# Altium PCB SW6124Demo board.PcbDoc (part 1 of 3)
Units mm, origin at the board's own origin, x right, y up, seen from the top; angles counter-clockwise.
Board outline 64 x 25.82 mm, 4 copper layers (Top Layer, Signal, power, Bottom Layer); 54 components, 46 nets, 211 pads, 291 vias.
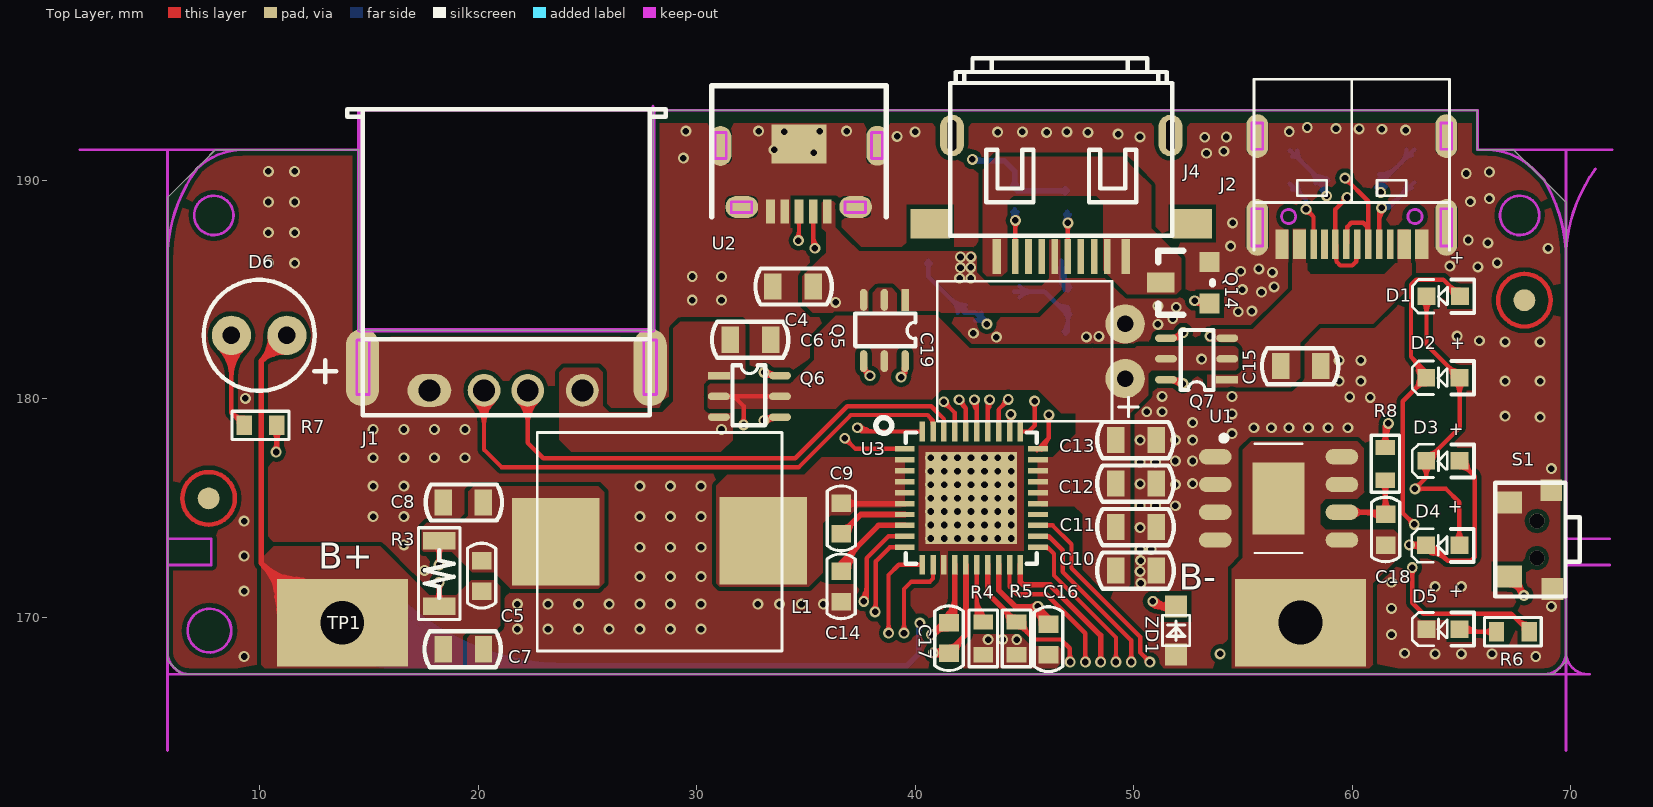
[diagram p0: Top Layer view]
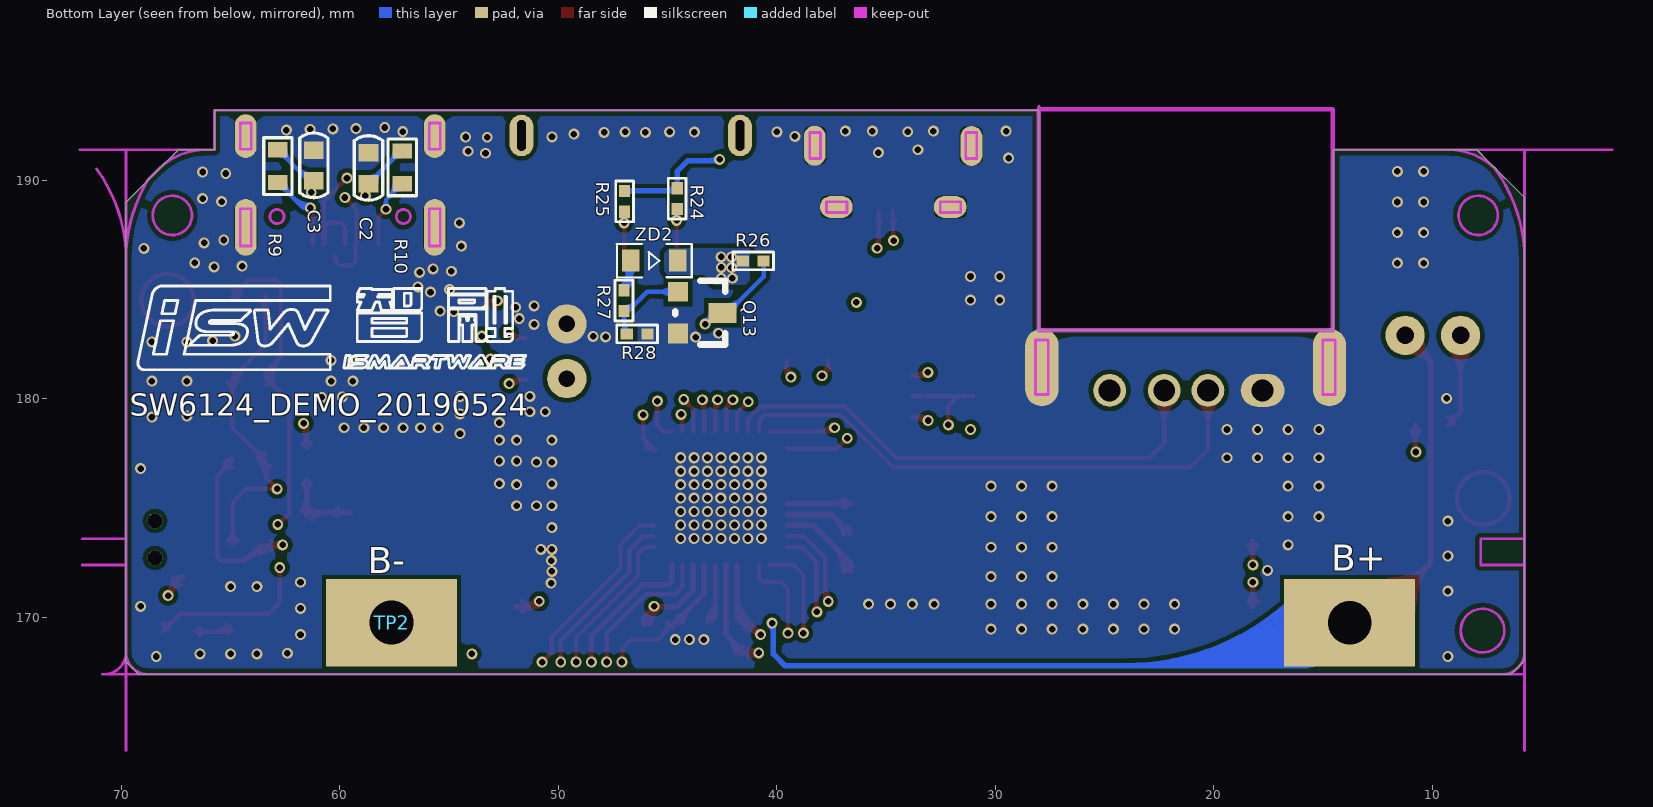
[diagram p1: Bottom Layer view, seen from below]
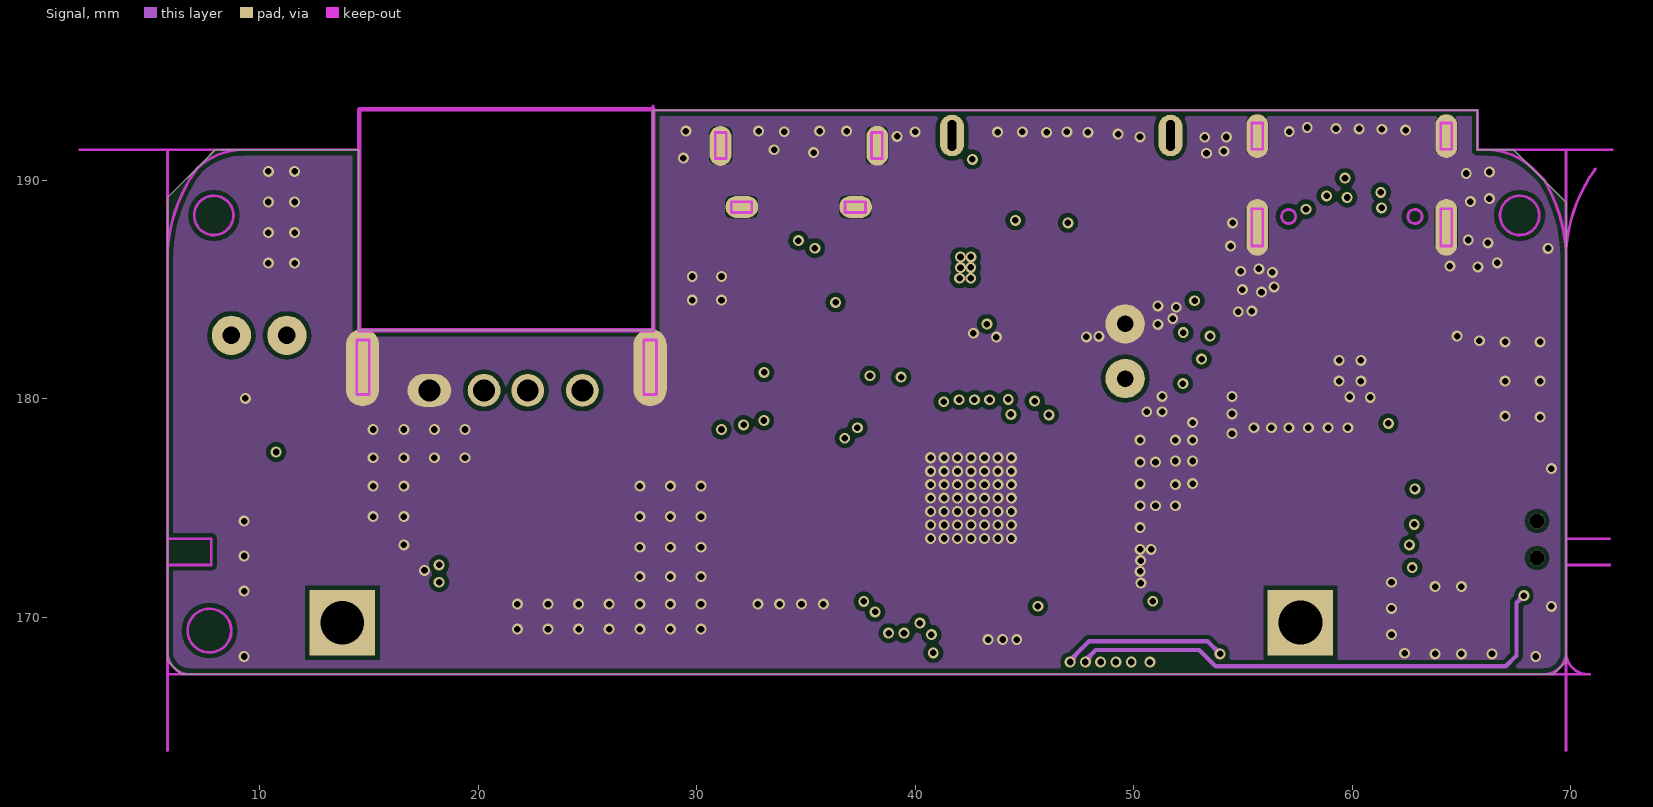
[diagram p2: Signal]
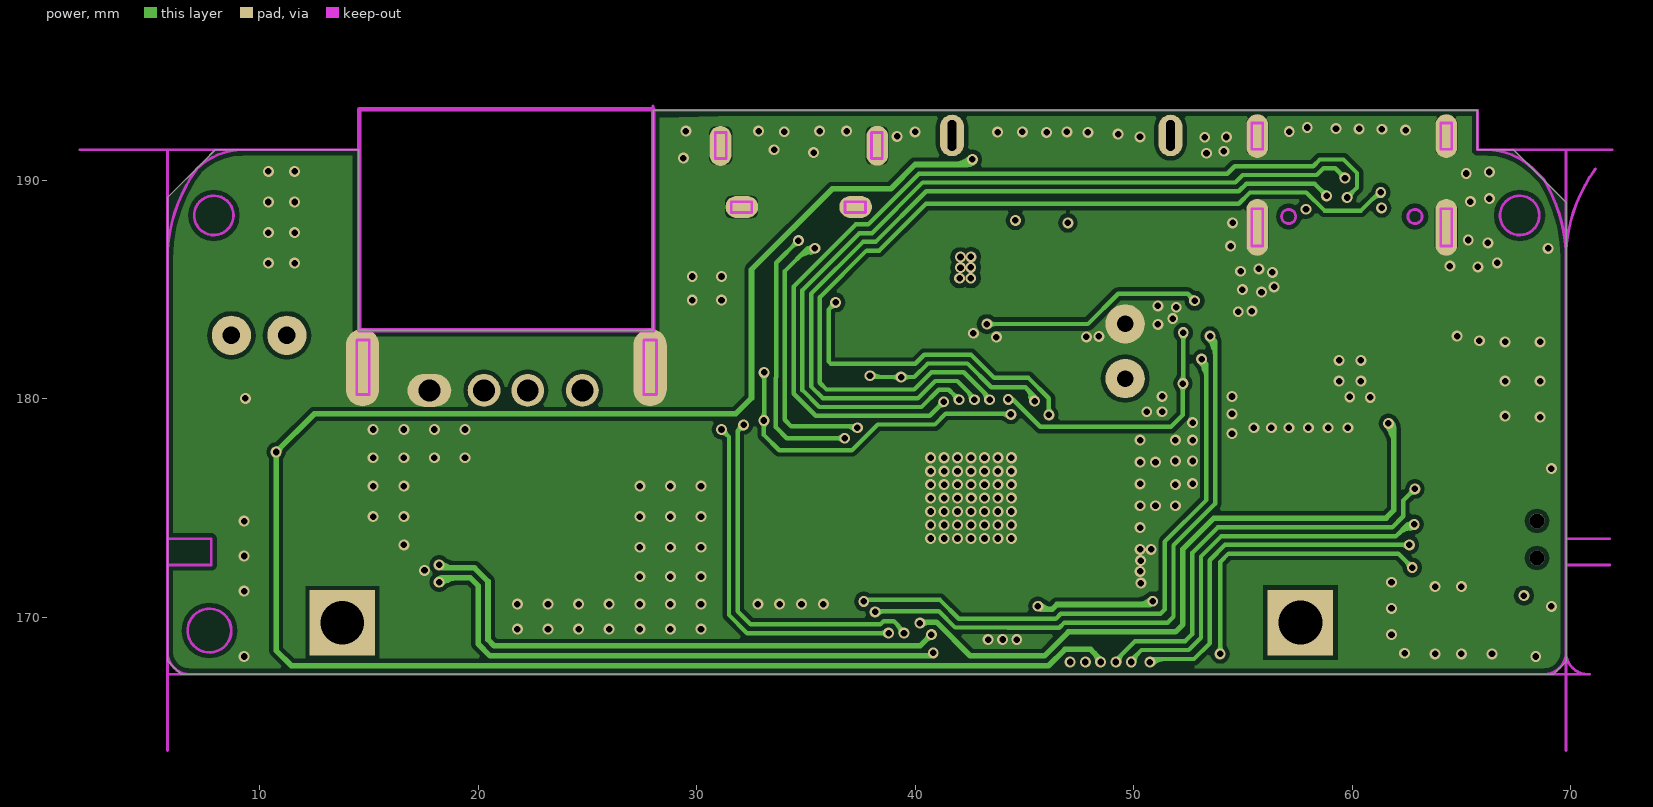
[diagram p3: power]

## Layer stack, top to bottom
Top Layer: signal copper 0.0356
Dielectric: core 0.32, FR-4, Dk 4.8
Signal: signal copper 0.0356
Dielectric: prepreg 0.32, FR-4, Dk 4.8
power: signal copper 0.0356
Dielectric: core 0.32, FR-4, Dk 4.8
Bottom Layer: signal copper 0.0356

## Board outline
7.523,167.381 6.412,167.381 5.848,167.945 5.79,168.003 5.79,170.127 5.79,189.203 7.443,190.856 7.975,191.388 9.24,191.388 14.297,191.388 14.299,191.391 14.302,191.388 14.54,191.388 14.54,183.152 14.553,183.139 28.013,183.139 28.013,193.201 65.73,193.201 65.73,191.388 67.389,191.388 69.433,189.344 69.786,188.991 69.786,168.531 69.786,167.956 69.379,167.549 69.211,167.381 67.881,167.381

## Design rules (kind name [scope] priority, off if disabled: settings)
Clearance [All] p1: gap=0.2
ComponentClearance [All] p1 off: gap=0.254 collisioncheckmode=3 verticalgap=0.254 showdistances=FALSE
FabricationTestpoint [(IsPad And (OnTopLayer Or OnBottomLayer))] p1: side=3 testpointundercomponent=TRUE minsize=1.016 maxsize=2.54 preferedsize=1.524 minholesize=0 maxholesize=1.016 preferedholesize=0.813 testpointgrid=0.025 allowsidetop=TRUE allowsidebottom=TRUE usegrid=TRUE gridtolerance=0
PolygonConnect [All] p1: connectstyle=Direct reliefconductorwidth=0.254 reliefentries=4 polygonreliefangle="90 Angle"
RoutingVias [All] p1: holewidth=0.4 width=0.6 viastyle="Through Hole" minholewidth=0.4 minwidth=0.6 maxholewidth=0.4 maxwidth=0.6
SilkscreenOverComponentPads [IsPad] p1: minsilkscreentomaskgap=0.254
SolderMaskExpansion [All] p1: expansion=0.102
Width [All] p1: maxlimit=10 minlimit=0.178 preferedwidth=0.381
25 further rules are at their usual default settings.

## Classes and differential pairs
component class SW6124_DEMO四层板: C2 C3 C4 C5 C6 C7 C8 C9 C10 C11 C12 C13 C14 C15 C16 C17 C18 C19 D1 D2 D3 D4 D5 D6 J1 J2 J4 L1 Q5 Q6 Q7 Q14 R3 R4 R5 R6 R7 R8 R24 R25 S1 TP1 TP2 U1 U2 U3 ZD2

## Components (designator, comment, footprint, x,y, rotation, side; value= is the part's Value field where it differs from the comment)
C2 "C0603" C0603 58.688,190.544 r270 bottom
C3 "C0603" C0603 61.19,190.662 r270 bottom
C4 "C0805" C0805 34.44,185.132 r0 top
C5 "C0603" C0603 20.161,171.889 r270 top
C6 "C0805" C0805 32.45,182.7 r180 top
C7 "C0805" C0805 19.297,168.535 r180 top
C8 "C0805" C0805 19.346,175.25 r0 top
C9 "C0603" C0603 36.623,174.511 r270 top
C10 "C0805" C0805 50.084,174.124 r180 top
C11 "C0805" C0805 50.084,172.134 r180 top
C12 "C0805" C0805 50.084,178.106 r180 top
C13 "C0805" C0805 50.084,176.115 r180 top
C14 "C0603" C0603 36.613,171.4 r270 top
C15 "C0805" C0805 57.621,181.489 r180 top
C16 "C0603" C0603 46.1,168.98 r270 top
C17 "C0603" C0603 41.55,169.05 r90 top (schematic designator C3)
C18 "C0603" C0603 61.53,174 r270 top (schematic designator C3)
C19 "Comment" 点解电容6.3*8 49.01,182.17 r90 top locked
D1 "LED" LED_0603 64.941,184.629 r180 top locked
D2 "LED" LED_0603 64.928,180.901 r180 top locked
D3 "LED" LED_0603 64.928,177.091 r180 top locked
D4 "LED" LED_0603 64.916,173.224 r180 top locked
D5 "LED" LED_0603 64.93,169.398 r180 top
D6 "LED_5MM" LED_5MM 9.982,182.898 r180 top
J1 "TYPE-A-1" USB-A-06 21.305,180.898 r180 top locked
J2 "TYPE-C" USB_TYPE_C_16PIN_A 59.97,189.55 r0 top locked
J4 "APPLE_PORT" Lightning 46.688,186.315 r0 top locked
L1 "SPM10102R2MESN" INDUCTOR_SPM1010 28.533,173.404 r180 top locked
Q5 "8205" SOT23-6 38.593,183.12 r180 top
Q6 "8205" SOT23-6 32.418,180.107 r270 top
Q7 "8205" SOT23-6 52.88,181.82 r90 top
Q13 "S8050" SOT-23 43.814,184.029 r270 bottom
Q14 "NMOS-2" SOT-23-3 52.456,185.311 r90 top
R3 "R1206" R1206 18.222,171.992 r90 top
R4 "R0603" R0603 43.12,168.98 r270 top
R5 "R0603" R0603 44.64,168.98 r270 top
R6 "R0603" R0603 67.306,169.333 r180 top
R7 "R0603" R0603 9.992,178.779 r180 top
R8 "R0603" R0603 61.52,176.97 r270 top (schematic designator R4)
R9 "R0603" R0603 62.834,190.69 r90 bottom (schematic designator R4)
R10 "R0603" R0603 57.144,190.638 r90 bottom (schematic designator R4)
R24 "R0603" R0402 44.567,188.662 r90 bottom
R25 "R0603" R0402 46.974,188.543 r90 bottom
R26 "R0402" R0402 41.572,186.313 r180 bottom
R27 "R0402" R0402 46.99,184.971 r270 bottom
R28 "R0402" R0402 46.885,182.972 r180 bottom
S1 "KEY" SMDTO024 69.168,171.297 r270 top locked
TP1 "B+" TIP_4*6 13.79,169.692 r0 top
TP2 "B-" TIP_4*6 57.632,169.7 r180 bottom
U1 "Comment" SOP-8-G 56.63,175.437 r0 top
U2 "USB_MICRO_B" UMB05H217 34.667,190.115 r0 top
U3 "SW6124" QFN40_EPAD_SW6124_6X6 42.57,175.45 r0 top locked
ZD1 "LED" SOD-323#1 51.91,169.327 r90 top (schematic designator D5)
ZD2 "5.1V" SOD-323#2 46.688,186.315 r180 bottom

## Footprints (in the part's own frame and the unit in brackets; to place one, negate y for a bottom-side part, rotate by r counter-clockwise, add the part's x,y. Pads: shape width x height; smd on the part's side, far side on the other; paste and mask are expansions set on the pad)
C0603 [mm]
  rect 0.8x0.9 smd: 1(0.7,0) 2(-0.7,0)
  silkscreen extent -1.49,-0.65 1.47,0.65, body extent -0.8,-0.4 0.8,0.4, height 0.8
C0805 [mm]
  rect 0.8x1.2 smd: 1(-0.95,0) 2(0.9,0)
  silkscreen extent -1.75,-0.82 1.75,0.82, body extent -1,-0.6 1,0.6, height 1.2
INDUCTOR_SPM1010 [mm]
  rect 4x4 smd: 1(4.975,-0.05) 2(-4.525,-0.1)
  silkscreen extent -5.38,-5.05 5.82,4.95
LED_5MM [mm]
  round 1.8 hole 0.8: 1(-1.27,0) 2(1.27,0)
  silkscreen extent -3.53,-2.54 2.54,2.54
LED_0603 [mm]
  rect 0.82x0.8 smd: 1(0.013,-0.057) 2(1.537,-0.057)
  silkscreen extent -0.65,-0.82 2.18,0.7
Lightning [mm]
  oval 1.1x1.9 hole 0.4 slot 1.4 at 90 deg: 0(-5,5.73) 0(5,5.73)
  rect 0.4x1.6 smd: 0(-2.95,0.2) 9(2.95,0.2)
  rect 1.8x1.35 smd: 0(6,1.7) " 0"(-6,1.7)
  rect 0.3x1.6 smd: 1(-2.1,0.2) 2(-1.5,0.2) 3(-0.9,0.2) 4(-0.3,0.2) 5(0.3,0.2) 6(0.9,0.2) 7(1.5,0.2) 8(2.1,0.2)
  silkscreen extent -5.08,1.14 5.08,9.27
QFN40_EPAD_SW6124_6X6 [mm]
  rect 0.9x0.25 smd mask+0.03: 1(-3.05,2.25) 2(-3.05,1.75) 3(-3.05,1.25) 4(-3.05,0.75) 5(-3.05,0.25) 6(-3.05,-0.25) 7(-3.05,-0.75) 8(-3.05,-1.25) 9(-3.05,-1.75) 10(-3.05,-2.25) 21(3.05,-2.25) 22(3.05,-1.75) 23(3.05,-1.25) 24(3.05,-0.75) 25(3.05,-0.25) 26(3.05,0.25) 27(3.05,0.75) 28(3.05,1.25) 29(3.05,1.75) 30(3.05,2.25)
  rect 0.25x0.9 smd mask+0.03: 11(-2.25,-3.05) 12(-1.75,-3.05) 13(-1.25,-3.05) 14(-0.75,-3.05) 15(-0.25,-3.05) 16(0.25,-3.05) 17(0.75,-3.05) 18(1.25,-3.05) 19(1.75,-3.05) 20(2.25,-3.05) 31(2.25,3.05) 32(1.75,3.05) 33(1.25,3.05) 34(0.75,3.05) 35(0.25,3.05) 36(-0.25,3.05) 37(-0.75,3.05) 38(-1.25,3.05) 39(-1.75,3.05) 40(-2.25,3.05)
  rect 4.2x4.2 smd mask+0.03: 41(0,0)
  silkscreen extent -4.36,-3 3,3.69
R0402 [mil]
  rect 22x20 smd: 1(0.5,-0.25) 2(38,-0.25)
  silkscreen extent -18,-16 56,16
R0603 [mm]
  rect 0.7x0.9 smd: 1(0.7,0) 2(-0.8,0)
  silkscreen extent -1.35,-0.65 1.25,0.65, body extent -0.85,-0.4 0.75,0.4, height 0.51
R1206 [mm]
  rect 0.8x1.5 smd: 1(-1.5,0) 2(1.5,0)
  silkscreen extent -2.1,-0.95 2.1,0.95, body extent -1.5,-0.75 1.5,0.75, height 0.61
SMDTO024 [mm]
  rect 1x1.2 smd: 1(-0.559,-2.006) 2(-3.959,-2.006)
  rect 1x1 smd: 3(0.011,-0.006) 4(-4.509,-0.056)
  round 0.7 hole 0.7 unplated: 5(-1.409,-0.706)
  round 0.7 hole 0.7: 6(-3.109,-0.706)
  silkscreen extent -4.86,-2.62 0.35,1.25
SOD-323#1 [mm]
  rect 1x1 smd: 1(-1.039,-0.032) 2(1.161,-0.032)
  silkscreen extent -0.64,-0.66 0.76,0.59
SOD-323#2 [mm]
  rect 0.8x1 smd: 1(0,0) 2(2.15,0)
  silkscreen extent -0.64,-0.78 2.8,0.76
SOP-8-G [mm] "SOIC, 8-Leads, Body 4.9x3.9mm, Pitc"
  rect 2.4x3.3 smd: 0(0,0)
  oval 1.5x0.7 smd: 1(-2.9,1.905) 2(-2.9,0.635) 3(-2.9,-0.635) 4(-2.9,-1.905) 5(2.9,-1.905) 6(2.9,-0.635) 7(2.9,0.635) 8(2.9,1.905)
  silkscreen extent -2.62,-2.5 1.1,2.88, body extent -2.97,-2.45 3.03,2.45, height 1.7
SOT23-6 [mm]
  rect 0.35x1 smd: 1(-0.95,-1.4)
  oval 0.35x1 smd: 2(0,-1.4) 3(0.95,-1.4) 4(0.95,1.4) 5(0,1.4) 6(-0.95,1.4)
  silkscreen extent -1.43,-0.78 1.33,0.72, body extent -1.45,-1.5 1.45,1.5, height 1.11
SOT-23 [mil]
  rect 36x36 smd: 1(-34,-28) 2(41,-28)
  rect 36x50 smd: 3(4,52)
  silkscreen extent -54,-33 61,57
SOT-23-3 [mil]
  rect 36x36 smd: 1(-37.88,-40.23) 2(37.12,-40.23)
  rect 36x50 smd: 3(0.12,47.64)
  silkscreen extent -58,-45 57,53
TIP_4*6 [mm]
  rect 6x4 / inner rect 3x3 / far side rect 6x4 hole 2: 1(-0.001,0.053)
UMB05H217 [mm]
  rect 0.4x1.1 smd: 1(1.317,-1.556) 2(0.667,-1.556) 3(0.017,-1.556) 4(-0.633,-1.556) 5(-1.283,-1.556)
  oval 1.5x1 all layers, no hole: 6(2.612,-1.34) 7(-2.598,-1.34)
  oval 1x1.829 all layers, no hole: 6(3.6,1.46) 7(-3.575,1.45)
  rect 1.524x1.778 smd: 8(0.517,1.544) 9(-0.483,1.544)
  Keep-Out Layer lines w0.127: -3.814,0.871 -3.814,2.071 -3.314,2.071 -3.314,0.871 -3.814,0.871 ; -3.086,-1.599 -2.146,-1.599 -2.146,-1.099 -3.086,-1.099 -3.086,-1.599 ; 2.128,-1.599 3.068,-1.599 3.068,-1.099 2.128,-1.099 2.128,-1.599 ; 3.333,0.871 3.333,2.071 3.833,2.071 3.833,0.871 3.333,0.871
  silkscreen extent -3.98,-1.8 4.02,4.2
USB-A-06 [mm]
  round 1.5 hole 1: 1(-3.467,0.519) 2(-0.967,0.519) 3(1.033,0.519)
  oval 2x1.5 hole 1: 4(3.533,0.519)
  oval 1.524x3.556 all layers, no hole: 6(-6.567,-0.531) 6(6.593,-0.531)
  Keep-Out Layer lines w0.127: 6.86,-1.774 6.86,0.709 6.286,0.709 6.286,-1.791 6.287,-1.79 6.845,-1.79 ; -6.28,-1.774 -6.28,0.709 -6.854,0.709 -6.854,-1.791 -6.853,-1.79 -6.295,-1.79
  Keep-Out Layer lines w0.203: 6.753,-2.241 6.753,-12.341 -6.707,-12.341 -6.707,-2.241 6.753,-2.241
  silkscreen extent -7.28,-12.35 7.3,1.65
USB_TYPE_C_16PIN_A [mm]
  rect 0.6x1.35 smd: A1(3.213,-2.479) A4(2.413,-2.479) A9(-2.387,-2.479) A12(-3.187,-2.479)
  rect 0.3x1.35 smd: A5(1.263,-2.479) A6(0.263,-2.479) A7(-0.237,-2.479) A8(-1.237,-2.479) B5(-1.737,-2.479) B6(-0.737,-2.479) B7(0.763,-2.479) B8(1.763,-2.479)
  oval 1x2.6 all layers, no hole: C1(-4.312,-1.714) C2(4.338,-1.714)
  oval 1x2 all layers, no hole: C3(-4.312,2.466) C4(4.338,2.466)
  Keep-Out Layer circle w0.127: c2.903,-1.214 r0.325
  Keep-Out Layer circle w0.127: c-2.877,-1.214 r0.325
  Keep-Out Layer lines w0.127: -4.562,-2.564 -4.062,-2.564 -4.062,-0.864 -4.562,-0.864 -4.562,-2.564 ; -4.562,1.866 -4.062,1.866 -4.062,3.066 -4.562,3.066 -4.562,1.866 ; 4.088,-2.564 4.588,-2.564 4.588,-0.864 4.088,-0.864 4.088,-2.564 ; 4.088,1.866 4.588,1.866 4.588,3.066 4.088,3.066 4.088,1.866
  silkscreen extent -4.46,-2.76 4.49,5.07
点解电容6.3*8 [mm]
  round 1.8 hole 0.75: 1(-1.25,-0.6) 2(1.25,-0.6)
  silkscreen extent -3.2,-1.2 3.2,8

## Part data
Q13: library part 2N3904, "NPN General Purpo"
Q14: "N-Channel"
S1: library part "SW K"
TP1 TP2: library part "Test Point"
ZD2: library part "Diode 10TQ035", "Schott"

## Free pads (board coordinates)
  round 1 smd: 0(7.67,175.437) 0(67.882,184.507)

## Via types
v1: diameter 0.5, hole 0.3, Top Layer to Bottom Layer, tented both sides, 242 vias
v2: diameter 0.508, hole 0.305, Top Layer to Bottom Layer, tented both sides, 49 vias

## Nets (pads, with @x,y where several pads share a name; then routed paths per layer and width w, separated by ;. In a path a pad name is that pad's centre, name@x,y a point inside that pad or via, vN(x,y) a via of type N, cw(c..) or ccw(c..) an arc to the next point about the centre after c; other vN are vias at no path point)
AGND: C2.2 C3.2 C4.1 C6.1 C7.1 C8.1 C10.1 C11.1 C12.1 C13.1 C14.1 C15.1 C16.1 C19.2 D5.2 J1.4 J1.6 J2.A1 J2.A12 J2.C1 J2.C2 J2.C3 J2.C4 Q13.2 Q14.2 R4.1 R5.1 R28.2 S1.2 S1.3 S1.4 U1.1 U1.2 U1.3 U1.4 U2.4 U2.5 U2.6 U2.7 U2.8 U2.9 U3.13 U3.41 ZD1.1
  other v1: 9.292,168.2 68.4,168.2 63.8,168.32 65,168.32 66.4,168.32 62.4,168.35 43.34,168.97 44,168.98 44.65,168.97 61.8,169.2 21.8,169.455 23.2,169.455 24.6,169.455 26,169.455 27.4,169.455 28.8,169.455 30.2,169.455 61.8,170.4 69.112,170.492 21.8,170.6 23.2,170.6 24.6,170.6 26,170.6 27.4,170.6 28.8,170.6 30.2,170.6 32.8,170.6 33.8,170.6 34.8,170.6 35.8,170.6 9.292,171.189 63.8,171.4 65,171.4 50.327,171.563 61.8,171.6 27.4,171.856 28.8,171.856 30.2,171.856 50.3,172.1 17.547,172.142 50.321,172.586 9.292,172.8 50.3,173.1 50.8,173.1 27.4,173.2 28.8,173.2 30.2,173.2 16.6,173.31 50.3,174.1 9.292,174.4 15.2,174.6 16.6,174.6 27.4,174.6 28.8,174.6 30.2,174.6 50.3,175.1 51,175.1 51.913,175.1 15.2,176 16.6,176 27.4,176 28.8,176 30.2,176 51.913,176.065 50.3,176.1 52.7,176.115 69.112,176.8 50.3,177.1 51,177.1 51.913,177.148 52.7,177.148 15.2,177.296 16.6,177.296 18,177.296 19.4,177.296 50.3,178.106 51.913,178.1 52.7,178.1 54.5,178.4 15.2,178.59 16.6,178.59 18,178.59 19.4,178.59 55.5,178.67 56.3,178.67 57.1,178.67 58,178.67 58.9,178.67 59.8,178.67 52.7,178.9 68.6,179.157 67,179.2 54.5,179.3 50.6,179.4 51.3,179.4 9.35,180.01 60.827,180.055 59.889,180.081 51.3,180.106 54.5,180.1 59.4,180.8 60.4,180.8 67,180.8 68.6,180.8 59.4,181.75 60.4,181.75 67,182.6 68.6,182.6 65.822,182.651 43.721,182.814 47.834,182.829 48.411,182.853 64.804,182.865 42.662,182.993 51.113,183.4 51.79,183.666 54.786,183.979 55.412,184.006 51.95,184.183 51.113,184.25 29.8,184.507 31.14,184.507 55.852,184.872 54.973,184.992 56.425,185.112 29.8,185.59 31.14,185.59 56.345,185.779 54.893,185.832 55.732,185.939 65.755,186.029 64.468,186.069 10.4,186.2 11.6,186.2 66.64,186.217 68.97,186.88 54.439,186.978 66.211,187.128 65.313,187.262 10.4,187.6 11.6,187.6 54.533,188.044 10.4,189 11.6,189 65.407,189.018 66.278,189.153 65.219,190.305 66.278,190.372 10.4,190.4 11.6,190.4 29.395,191.011 53.333,191.23 35.353,191.263 54.133,191.323 33.549,191.391 53.253,191.963 54.24,191.976 39.178,192.001 50.291,191.983 49.286,192.109 39.999,192.209 43.777,192.2 46.017,192.189 47.903,192.189 34.01,192.214 44.908,192.211 46.943,192.211 57.12,192.221 29.507,192.242 32.835,192.242 35.633,192.242 36.863,192.242 62.45,192.292 61.356,192.331 59.259,192.357 60.314,192.344 57.944,192.409
  other v2: 40.71,173.604 41.326,173.604 41.941,173.604 42.556,173.604 43.172,173.604 43.787,173.604 44.402,173.604 40.71,174.219 41.326,174.219 41.941,174.219 42.556,174.219 43.172,174.219 43.787,174.219 44.402,174.219 40.71,174.835 41.326,174.835 41.941,174.835 42.556,174.835 43.172,174.835 43.787,174.835 44.402,174.835 40.71,175.45 41.326,175.45 41.941,175.45 42.57,175.45 43.172,175.45 43.787,175.45 44.402,175.45 40.71,176.065 41.326,176.065 41.941,176.065 42.556,176.065 43.172,176.065 43.787,176.065 44.402,176.065 40.71,176.681 41.326,176.681 41.941,176.681 42.556,176.681 43.172,176.681 43.787,176.681 44.402,176.681 40.71,177.296 41.326,177.296 41.941,177.296 42.556,177.296 43.172,177.296 43.787,177.296 44.402,177.296
B-: C18.1 TP2.1 U1.0 U1.5 U1.7 U1.8
BAT: C5.1 C7.2 C17.2 D6.1 R3.1 R8.2 TP1.1 U3.15 | length 652
  Top Layer w0.254: D6.1@11.252,182.898 10.07,181.716 ; TP1.1@13.79,169.745 12.805,169.745 10.07,172.48 10.07,181.716 ; v1(18.22,171.6) 18.22,170.494 R3.1@18.222,170.492 ; v1(40.83,168.37) v1@40.85,168.35 ; v1@40.943,168.321 cw(c41.157,168.228) 41.096,168.453 ; v1@40.96,168.448 cw(c40.96,168.143) C17.2@41.245,168.252 ; 41.077,168.448 ccw(c41.077,168.773) C17.2@41.307,168.543 ; C17.2@41.14,168.465 ccw(c41.227,168.141) v1@40.937,168.309 ; U3.15@42.32,172.4 42.327,172.393 42.327,169.208 41.55,168.431 C17.2@41.55,168.35 v1@40.85,168.35 ; R8.2@61.52,177.77 61.52,178.73 v1(61.66,178.87) ; 10.07,181.716 cw(c11.074,180.712) D6.1@11.189,182.128 ; 10.07,181.716 ccw(c9.066,182.72) D6.1@10.481,182.835 ; 10.07,181.716 ccw(c9.066,182.72) D6.1@10.481,182.835 ; 10.07,181.716 cw(c11.074,180.712) D6.1@11.189,182.128 ; 10.07,181.716 ccw(c9.066,182.72) D6.1@10.481,182.835 ; 10.07,181.716 cw(c11.074,180.712) D6.1@11.189,182.128 ; 10.07,172.48 cw(c7.937,170.347) TP1.1@10.931,169.976 ; 10.07,172.48 ccw(c12.228,174.637) TP1.1@12.576,171.606 ; 10.07,172.48 ccw(c12.228,174.637) TP1.1@12.576,171.606 ; 10.07,172.48 cw(c7.937,170.347) TP1.1@10.931,169.976 ; 10.07,172.48 ccw(c12.228,174.637) TP1.1@12.576,171.606 ; 10.07,172.48 cw(c7.937,170.347) TP1.1@10.931,169.976 ; 10.438,172.112 cw(c8.591,170.266) TP1.1@11.183,169.945 ; 10.438,172.112 cw(c8.591,170.266) TP1.1@11.183,169.945 ; 10.438,172.112 cw(c8.591,170.266) TP1.1@11.183,169.945 ; 10.442,172.108 ccw(c12.304,173.97) TP1.1@12.605,171.354 ; 10.442,172.108 ccw(c12.304,173.97) TP1.1@12.605,171.354 ; 10.442,172.108 ccw(c12.304,173.97) TP1.1@12.605,171.354 ; 10.458,182.105 cw(c11.133,181.43) D6.1@11.21,182.381 ; 10.458,182.105 ccw(c9.784,182.779) D6.1@10.735,182.856 ; 10.458,182.105 ccw(c9.784,182.779) D6.1@10.735,182.856 ; 10.458,182.105 cw(c11.133,181.43) D6.1@11.21,182.381 ; 10.458,182.105 ccw(c9.784,182.779) D6.1@10.735,182.856 ; 10.458,182.105 cw(c11.133,181.43) D6.1@11.21,182.381 ; 10.718,171.504 ccw(c14.363,172.013) TP1.1@12.264,168.989 ; 10.718,171.504 ccw(c14.363,172.013) TP1.1@12.264,168.989 ; 10.718,171.504 ccw(c14.363,172.013) TP1.1@12.264,168.989 ; TP1.1@10.798,170.93 ccw(c13.913,171.364) TP1.1@12.12,168.78 ; TP1.1@10.798,170.93 ccw(c13.913,171.364) TP1.1@12.12,168.78 ; TP1.1@10.798,170.93 ccw(c13.913,171.364) TP1.1@12.12,168.78 ; TP1.1@10.806,171.744 cw(c9.246,170.185) TP1.1@11.435,169.913 ; TP1.1@10.806,171.744 cw(c9.246,170.185) TP1.1@11.435,169.913 ; TP1.1@10.806,171.744 cw(c9.246,170.185) TP1.1@11.435,169.913 ; TP1.1@10.814,171.736 ccw(c12.381,173.303) TP1.1@12.634,171.101 ; TP1.1@10.814,171.736 ccw(c12.381,173.303) TP1.1@12.634,171.101 ; TP1.1@10.814,171.736 ccw(c12.381,173.303) TP1.1@12.634,171.101 ; TP1.1@10.878,170.355 ccw(c13.463,170.716) TP1.1@11.975,168.572 ; TP1.1@10.878,170.355 ccw(c13.463,170.716) TP1.1@11.975,168.572 ; TP1.1@10.878,170.355 ccw(c13.463,170.716) TP1.1@11.975,168.572 ; 11.141,171.819 cw(c10.631,168.384) TP1.1@13.569,170.237 ; 11.141,171.819 cw(c10.631,168.384) TP1.1@13.569,170.237 ; 11.141,171.819 cw(c10.631,168.384) TP1.1@13.569,170.237 ; TP1.1@11.173,171.377 cw(c9.9,170.103) TP1.1@11.687,169.882 ; TP1.1@11.173,171.377 cw(c9.9,170.103) TP1.1@11.687,169.882 ; TP1.1@11.173,171.377 cw(c9.9,170.103) TP1.1@11.687,169.882 ; TP1.1@11.186,171.364 ccw(c12.458,172.636) TP1.1@12.663,170.849 ; TP1.1@11.186,171.364 ccw(c12.458,172.636) TP1.1@12.663,170.849 ; TP1.1@11.186,171.364 ccw(c12.458,172.636) TP1.1@12.663,170.849 ; TP1.1@11.689,171.738 cw(c11.249,168.773) TP1.1@13.783,170.372 ; TP1.1@11.689,171.738 cw(c11.249,168.773) TP1.1@13.783,170.372 ; TP1.1@11.689,171.738 cw(c11.249,168.773) TP1.1@13.783,170.372 ; R3.1@18.029,170.685 ccw(c17.567,171.147) 18.22,171.147 ; R3.1@18.029,170.685 ccw(c17.567,171.147) 18.22,171.147 ; R3.1@18.029,170.685 ccw(c17.567,171.147) 18.22,171.147 ; v1@18.133,171.513 cw(c17.923,171.303) 18.22,171.303 ; v1@18.133,171.513 cw(c17.923,171.303) 18.22,171.303 ; v1@18.133,171.513 cw(c17.923,171.303) 18.22,171.303 ; 18.22,171.155 ccw(c18.885,171.155) R3.1@18.415,170.685 ; 18.22,171.155 ccw(c18.885,171.155) R3.1@18.415,170.685 ; 18.22,171.155 ccw(c18.885,171.155) R3.1@18.415,170.685 ; 18.22,171.303 cw(c18.517,171.303) v1@18.307,171.513 ; 18.22,171.303 cw(c18.517,171.303) v1@18.307,171.513 ; 18.22,171.303 cw(c18.517,171.303) v1@18.307,171.513 ; v1@40.85,168.35 cw(c40.85,167.713) C17.2@41.305,168.159 ; v1@40.85,168.35 ccw(c40.85,168.987) C17.2@41.305,168.541 ; v1@40.85,168.35 ccw(c40.85,168.987) C17.2@41.305,168.541 ; v1@40.85,168.35 cw(c40.85,167.713) C17.2@41.305,168.159 ; v1@40.85,168.35 ccw(c40.85,168.987) C17.2@41.305,168.541 ; v1@40.85,168.35 cw(c40.85,167.713) C17.2@41.305,168.159 ; v1@40.891,168.263 cw(c41.016,168.048) 41.08,168.288 ; v1@40.891,168.263 cw(c41.016,168.048) 41.08,168.288 ; v1@40.891,168.263 cw(c41.016,168.048) 41.08,168.288 ; v1@40.891,168.263 cw(c41.016,168.048) 41.08,168.288 ; v1@40.891,168.263 cw(c41.016,168.048) 41.08,168.288 ; v1@40.891,168.263 cw(c41.016,168.048) 41.08,168.288 ; v1@40.892,168.477 ccw(c41.034,168.724) C17.2@41.108,168.448 ; v1@40.892,168.477 ccw(c41.034,168.724) C17.2@41.108,168.448 ; v1@40.892,168.477 ccw(c41.034,168.724) C17.2@41.108,168.448 ; v1@40.891,168.477 ccw(c41.021,168.7) 41.088,168.451 cw(c41.021,168.7) v1@40.892,168.477 ; v1@40.892,168.477 ccw(c41.034,168.724) C17.2@41.108,168.448 ; v1@40.892,168.477 ccw(c41.034,168.724) C17.2@41.108,168.448 ; v1@40.904,168.468 ccw(c41.061,168.675) C17.2@41.128,168.424 ; v1@40.904,168.468 ccw(c41.061,168.675) C17.2@41.128,168.424 ; v1@40.904,168.468 ccw(c41.061,168.675) C17.2@41.128,168.424 ; v1@40.904,168.468 ccw(c41.061,168.675) C17.2@41.128,168.424 ; v1@40.904,168.468 ccw(c41.061,168.675) C17.2@41.128,168.424 ; v1@40.904,168.468 ccw(c41.061,168.675) C17.2@41.128,168.424 ; v1@40.917,168.457 ccw(c41.175,168.715) C17.2@41.175,168.35 ; v1@40.917,168.457 ccw(c41.175,168.715) C17.2@41.175,168.35 ; v1@40.917,168.457 ccw(c41.175,168.715) C17.2@41.175,168.35 ; v1@40.937,168.309 cw(c41.203,168.155) C17.2@41.124,168.452 ; v1@40.937,168.309 cw(c41.203,168.155) C17.2@41.124,168.452 ; v1@40.937,168.309 cw(c41.203,168.155) C17.2@41.124,168.452 ; v1@40.937,168.309 cw(c41.203,168.155) C17.2@41.124,168.452 ; v1@40.937,168.309 cw(c41.203,168.155) C17.2@41.124,168.452 ; v1@40.937,168.432 ccw(c41.235,168.604) C17.2@41.146,168.271 ; v1@40.937,168.432 ccw(c41.235,168.604) C17.2@41.146,168.271 ; v1@40.937,168.432 ccw(c41.235,168.604) C17.2@41.146,168.271 ; v1@40.937,168.432 ccw(c41.235,168.604) C17.2@41.146,168.271 ; v1@40.937,168.432 ccw(c41.235,168.604) C17.2@41.146,168.271 ; v1@40.937,168.432 ccw(c41.235,168.604) C17.2@41.146,168.271 ; v1@40.994,168.424 cw(c40.994,168.155) C17.2@41.245,168.252 ; v1@40.994,168.424 cw(c40.994,168.155) C17.2@41.245,168.252 ; v1@40.994,168.424 cw(c40.994,168.155) C17.2@41.245,168.252 ; v1@40.994,168.424 cw(c40.994,168.155) C17.2@41.245,168.252 ; v1@41.021,168.424 ccw(c41.021,168.829) C17.2@41.307,168.543 ; v1@41.021,168.424 ccw(c41.021,168.829) C17.2@41.307,168.543 ; v1@41.021,168.424 ccw(c41.021,168.829) C17.2@41.307,168.543 ; v1@41.021,168.424 ccw(c41.021,168.829) C17.2@41.307,168.543 ; C17.2@41.6,168.623 ccw(c41.6,168.967) C17.2@41.843,168.724 ; C17.2@41.6,168.623 ccw(c41.6,168.967) C17.2@41.843,168.724 ; C17.2@41.6,168.623 ccw(c41.6,168.967) C17.2@41.843,168.724 ; C17.2@41.873,168.35 cw(c42.847,168.35) 42.158,169.039 ; C17.2@41.873,168.35 cw(c42.847,168.35) 42.158,169.039 ; C17.2@41.873,168.35 cw(c42.847,168.35) 42.158,169.039 ; R8.2@61.362,177.928 ccw(c60.982,178.308) 61.52,178.308 ; R8.2@61.362,177.928 ccw(c60.982,178.308) 61.52,178.308 ; R8.2@61.362,177.928 ccw(c60.982,178.308) 61.52,178.308 ; 61.52,178.235 cw(c62.295,178.235) v1@61.747,178.783 ; 61.52,178.235 cw(c62.295,178.235) v1@61.747,178.783 ; 61.52,178.235 cw(c62.295,178.235) v1@61.747,178.783 ; 61.52,178.308 ccw(c62.058,178.308) R8.2@61.678,177.928 ; 61.52,178.308 ccw(c62.058,178.308) R8.2@61.678,177.928 ; 61.52,178.308 ccw(c62.058,178.308) R8.2@61.678,177.928 ; v1@61.562,178.796 cw(c61.345,178.631) 61.581,178.495 ; v1@61.562,178.796 cw(c61.345,178.631) 61.581,178.495 ; v1@61.562,178.796 cw(c61.345,178.631) 61.581,178.495 ; 10.344,182.084 cw(c11.739,181.829) 11.151,183.119 ccw(c11.739,181.829) 10.344,182.084 ; 10.437,181.99 ccw(c10.182,183.385) 11.473,182.797 cw(c10.182,183.385) 10.437,181.99 ; C17.2@41.593,168.368 ccw(c41.373,168.973) 41.995,168.807 cw(c41.373,168.973) C17.2@41.593,168.368
  power w0.254: v1(18.22,171.6) 18.42,171.8 19.648,171.8 20,171.448 20,168.785 20.552,168.233 40.693,168.233 v1(40.83,168.37) ; v1(40.22,169.73) 40.267,169.777 40.979,169.777 42.523,168.233 45.915,168.233 47.009,169.327 51.91,169.327 52.253,169.67 52.253,173.118 53.672,174.537 61.55,174.537 61.913,174.9 61.913,178.617 v1(61.66,178.87) ; v1@18.127,171.693 cw(c18.387,171.433) 18.387,171.8 ; v1@18.127,171.693 cw(c18.387,171.433) 18.387,171.8 ; v1@18.127,171.693 cw(c18.387,171.433) 18.387,171.8 ; v1@18.307,171.513 cw(c19,170.82) 19,171.8 ; v1@18.307,171.513 cw(c19,170.82) 19,171.8 ; v1@18.307,171.513 cw(c19,170.82) 19,171.8 ; v1@40.307,169.643 cw(c40.63,169.32) 40.63,169.777 ; v1@40.307,169.643 cw(c40.63,169.32) 40.63,169.777 ; v1@40.307,169.643 cw(c40.63,169.32) 40.63,169.777 ; v1@61.573,178.783 cw(c60.752,177.962) 61.913,177.962 ; v1@61.573,178.783 cw(c60.752,177.962) 61.913,177.962 ; v1@61.573,178.783 cw(c60.752,177.962) 61.913,177.962 ; v1@61.66,178.747 cw(c61.66,178.45) 61.87,178.66 ; v1@61.66,178.747 cw(c61.66,178.45) 61.87,178.66 ; v1@61.66,178.747 cw(c61.66,178.45) 61.87,178.66 ; v1@61.753,178.963 cw(c61.365,178.575) 61.913,178.575 ; v1@61.753,178.963 cw(c61.365,178.575) 61.913,178.575 ; v1@61.753,178.963 cw(c61.365,178.575) 61.913,178.575 ; v1@61.783,178.87 ccw(c62.08,178.87) 61.87,178.66 ; v1@61.783,178.87 ccw(c62.08,178.87) 61.87,178.66 ; v1@61.783,178.87 ccw(c62.08,178.87) 61.87,178.66 ; v1@18.271,171.712 ccw(c18.459,172.127) 18.687,171.732 cw(c18.459,172.127) v1@18.271,171.712 ; v1@61.778,178.835 ccw(c62.407,178.65) 61.839,178.322 cw(c62.407,178.65) v1@61.778,178.835
  Bottom Layer w0.254: TP1.1@13.79,169.745 15.756,167.779 39.629,167.779 40.163,168.313 40.163,169.673 v1(40.22,169.73) ; TP1.1@14.511,170.623 cw(c15.061,168.89) TP1.1@16.789,169.458 ; TP1.1@14.588,170.381 cw(c15.139,168.646) 16.869,169.215 ; TP1.1@14.709,170.663 cw(c14.884,168.672) 16.813,169.195 ; TP1.1@14.731,170.41 cw(c14.912,168.365) 16.893,168.902 ; TP1.1@14.85,170.664 cw(c14.708,168.491) 16.827,168.993 ; TP1.1@14.866,170.918 cw(c14.731,168.85) TP1.1@16.748,169.328 ; TP1.1@14.938,170.654 cw(c14.563,168.36) 16.835,168.854 ; TP1.1@14.979,170.905 cw(c14.628,168.756) TP1.1@16.756,169.219 ; TP1.1@13.779,168.735 ccw(c16.088,171.044) TP1.1@16.088,167.779 ; TP1.1@13.779,168.735 ccw(c16.088,171.044) TP1.1@16.088,167.779 ; TP1.1@13.779,168.735 ccw(c16.088,171.044) TP1.1@16.088,167.779 ; TP1.1@13.959,168.915 ccw(c16.701,171.657) TP1.1@16.701,167.779 ; TP1.1@13.959,168.915 ccw(c16.701,171.657) TP1.1@16.701,167.779 ; TP1.1@13.959,168.915 ccw(c16.701,171.657) TP1.1@16.701,167.779 ; TP1.1@14.138,169.094 ccw(c17.314,172.27) 17.314,167.779 ; TP1.1@14.138,169.094 ccw(c17.314,172.27) 17.314,167.779 ; TP1.1@14.138,169.094 ccw(c17.314,172.27) 17.314,167.779 ; TP1.1@14.318,169.274 ccw(c17.927,172.883) 17.927,167.779 ; TP1.1@14.318,169.274 ccw(c17.927,172.883) 17.927,167.779 ; TP1.1@14.318,169.274 ccw(c17.927,172.883) 17.927,167.779 ; TP1.1@14.498,169.453 ccw(c18.541,173.496) 18.541,167.779 ; TP1.1@14.498,169.453 ccw(c18.541,173.496) 18.541,167.779 ; TP1.1@14.498,169.453 ccw(c18.541,173.496) 18.541,167.779 ; TP1.1@14.677,169.633 ccw(c19.154,174.11) 19.154,167.779 ; TP1.1@14.677,169.633 ccw(c19.154,174.11) 19.154,167.779 ; TP1.1@14.677,169.633 ccw(c19.154,174.11) 19.154,167.779 ; TP1.1@14.857,169.813 ccw(c19.767,174.723) 19.767,167.779 ; TP1.1@14.857,169.813 ccw(c19.767,174.723) 19.767,167.779 ; TP1.1@14.857,169.813 ccw(c19.767,174.723) 19.767,167.779 ; TP1.1@15.036,169.992 ccw(c20.38,175.336) 20.38,167.779 ; TP1.1@15.036,169.992 ccw(c20.38,175.336) 20.38,167.779 ; TP1.1@15.036,169.992 ccw(c20.38,175.336) 20.38,167.779 ; TP1.1@15.216,170.172 ccw(c20.993,175.949) 20.993,167.779 ; TP1.1@15.216,170.172 ccw(c20.993,175.949) 20.993,167.779 ; TP1.1@15.216,170.172 ccw(c20.993,175.949) 20.993,167.779 ; TP1.1@15.281,168.472 cw(c15.724,167.324) TP1.1@16.34,168.39 ; TP1.1@15.281,168.472 cw(c15.724,167.324) TP1.1@16.34,168.39 ; TP1.1@15.281,168.472 cw(c15.724,167.324) TP1.1@16.34,168.39 ; TP1.1@15.36,168.505 cw(c15.989,167.138) TP1.1@16.741,168.441 ; TP1.1@15.36,168.505 cw(c15.989,167.138) TP1.1@16.741,168.441 ; TP1.1@15.36,168.505 cw(c15.989,167.138) TP1.1@16.741,168.441 ; TP1.1@15.373,168.235 cw(c15.97,166.687) 16.8,168.124 ; TP1.1@15.373,168.235 cw(c15.97,166.687) 16.8,168.124 ; TP1.1@15.373,168.235 cw(c15.97,166.687) 16.8,168.124 ; TP1.1@15.396,170.351 ccw(c21.607,176.562) 21.607,167.779 ; TP1.1@15.396,170.351 ccw(c21.607,176.562) 21.607,167.779 ; TP1.1@15.396,170.351 ccw(c21.607,176.562) 21.607,167.779 ; TP1.1@15.466,168.274 cw(c16.24,166.591) 17.167,168.196 ; TP1.1@15.466,168.274 cw(c16.24,166.591) 17.167,168.196 ; TP1.1@15.466,168.274 cw(c16.24,166.591) 17.167,168.196 ; TP1.1@15.527,168.597 cw(c16.165,167.604) 16.79,168.605 ; TP1.1@15.527,168.597 cw(c16.165,167.604) 16.79,168.605 ; TP1.1@15.527,168.597 cw(c16.165,167.604) 16.79,168.605 ; TP1.1@15.572,168.044 cw(c16.492,166.044) 17.592,167.95 ; TP1.1@15.572,168.044 cw(c16.492,166.044) 17.592,167.95 ; TP1.1@15.572,168.044 cw(c16.492,166.044) 17.592,167.95 ; TP1.1@15.575,170.531 ccw(c22.22,177.176) 22.22,167.779 ; TP1.1@15.575,170.531 ccw(c22.22,177.176) 22.22,167.779 ; TP1.1@15.575,170.531 ccw(c22.22,177.176) 22.22,167.779 ; TP1.1@15.665,168.383 cw(c16.405,167.23) 17.131,168.392 ; TP1.1@15.665,168.383 cw(c16.405,167.23) 17.131,168.392 ; TP1.1@15.665,168.383 cw(c16.405,167.23) 17.131,168.392 ; TP1.1@15.694,168.723 cw(c16.307,168.029) 16.822,168.799 ; TP1.1@15.694,168.723 cw(c16.307,168.029) 16.822,168.799 ; TP1.1@15.694,168.723 cw(c16.307,168.029) 16.822,168.799 ; TP1.1@15.755,170.711 ccw(c22.833,177.789) 22.833,167.779 ; TP1.1@15.755,170.711 ccw(c22.833,177.789) 22.833,167.779 ; TP1.1@15.755,170.711 ccw(c22.833,177.789) 22.833,167.779 ; TP1.1@15.802,168.169 cw(c16.645,166.857) 17.471,168.18 ; TP1.1@15.802,168.169 cw(c16.645,166.857) 17.471,168.18 ; TP1.1@15.802,168.169 cw(c16.645,166.857) 17.471,168.18 ; TP1.1@15.845,168.879 cw(c16.421,168.407) 16.851,169.015 ; TP1.1@15.845,168.879 cw(c16.421,168.407) 16.851,169.015 ; TP1.1@15.845,168.879 cw(c16.421,168.407) 16.851,169.015 ; TP1.1@15.862,168.533 cw(c16.533,167.774) 17.096,168.616 ; TP1.1@15.862,168.533 cw(c16.533,167.774) 17.096,168.616 ; TP1.1@15.862,168.533 cw(c16.533,167.774) 17.096,168.616 ; TP1.1@15.873,169.5 ccw(c16.882,169.271) TP1.1@16.365,168.375 ; TP1.1@15.873,169.5 ccw(c16.882,169.271) TP1.1@16.365,168.375 ; TP1.1@15.873,169.5 ccw(c16.882,169.271) TP1.1@16.365,168.375 ; TP1.1@15.899,169.692 ccw(c17.121,169.634) TP1.1@16.509,168.575 ; TP1.1@15.899,169.692 ccw(c17.121,169.634) TP1.1@16.509,168.575 ; TP1.1@15.899,169.692 ccw(c17.121,169.634) TP1.1@16.509,168.575 ; TP1.1@15.934,170.89 ccw(c23.446,178.402) 23.446,167.779 ; TP1.1@15.934,170.89 ccw(c23.446,178.402) 23.446,167.779 ; TP1.1@15.934,170.89 ccw(c23.446,178.402) 23.446,167.779 ; TP1.1@16.03,168.342 cw(c16.759,167.519) 17.37,168.433 ; TP1.1@16.03,168.342 cw(c16.759,167.519) 17.37,168.433 ; TP1.1@16.03,168.342 cw(c16.759,167.519) 17.37,168.433 ; TP1.1@16.041,168.718 cw(c16.632,168.233) 17.074,168.857 ; TP1.1@16.041,168.718 cw(c16.632,168.233) 17.074,168.857 ; TP1.1@16.041,168.718 cw(c16.632,168.233) 17.074,168.857 ; TP1.1@16.114,171.07 ccw(c24.06,179.015) 24.06,167.779 ; TP1.1@16.114,171.07 ccw(c24.06,179.015) 24.06,167.779 ; TP1.1@16.114,171.07 ccw(c24.06,179.015) 24.06,167.779 ; TP1.1@16.121,169.444 ccw(c17.234,169.191) TP1.1@16.663,168.203 ; TP1.1@16.121,169.444 ccw(c17.234,169.191) TP1.1@16.663,168.203 ; TP1.1@16.121,169.444 ccw(c17.234,169.191) TP1.1@16.663,168.203 ; TP1.1@16.153,169.68 ccw(c17.589,169.612) 16.87,168.367 ; TP1.1@16.153,169.68 ccw(c17.589,169.612) 16.87,168.367 ; TP1.1@16.153,169.68 ccw(c17.589,169.612) 16.87,168.367 ; TP1.1@16.154,169.705 ccw(c17.357,169.67) TP1.1@16.72,168.649 ; TP1.1@16.154,169.705 ccw(c17.357,169.67) TP1.1@16.72,168.649 ; TP1.1@16.154,169.705 ccw(c17.357,169.67) TP1.1@16.72,168.649 ; TP1.1@16.237,168.557 cw(c16.844,168.059) 17.297,168.7 ; TP1.1@16.237,168.557 cw(c16.844,168.059) 17.297,168.7 ; TP1.1@16.237,168.557 cw(c16.844,168.059) 17.297,168.7 ; TP1.1@16.369,169.387 ccw(c17.586,169.112) 16.962,168.031 ; TP1.1@16.369,169.387 ccw(c17.586,169.112) 16.962,168.031 ; TP1.1@16.369,169.387 ccw(c17.586,169.112) 16.962,168.031 ; TP1.1@16.394,169.96 ccw(c17.317,170.083) TP1.1@16.762,169.336 ; TP1.1@16.394,169.96 ccw(c17.317,170.083) TP1.1@16.762,169.336 ; TP1.1@16.394,169.96 ccw(c17.317,170.083) TP1.1@16.762,169.336 ; TP1.1@16.406,169.836 ccw(c17.499,169.897) 16.867,169.004 ; TP1.1@16.406,169.836 ccw(c17.499,169.897) 16.867,169.004 ; TP1.1@16.406,169.836 ccw(c17.499,169.897) 16.867,169.004 ; TP1.1@16.407,169.668 ccw(c18.057,169.59) 17.231,168.158 ; TP1.1@16.407,169.668 ccw(c18.057,169.59) 17.231,168.158 ; TP1.1@16.407,169.668 ccw(c18.057,169.59) 17.231,168.158 ; TP1.1@16.408,169.698 ccw(c17.87,169.655) 17.095,168.415 ; TP1.1@16.408,169.698 ccw(c17.87,169.655) 17.095,168.415 ; TP1.1@16.408,169.698 ccw(c17.87,169.655) 17.095,168.415 ; TP1.1@16.409,169.75 ccw(c17.679,169.754) 16.973,168.698 ; TP1.1@16.409,169.75 ccw(c17.679,169.754) 16.973,168.698 ; TP1.1@16.409,169.75 ccw(c17.679,169.754) 16.973,168.698 ; TP1.1@16.646,169.993 ccw(c18.149,170.194) 17.244,168.977 ; TP1.1@16.646,169.993 ccw(c18.149,170.194) 17.244,168.977 ; TP1.1@16.646,169.993 ccw(c18.149,170.194) 17.244,168.977 ; TP1.1@16.648,169.98 ccw(c17.4,170.075) 16.935,169.475 ; TP1.1@16.648,169.98 ccw(c17.4,170.075) 16.935,169.475 ; TP1.1@16.648,169.98 ccw(c17.4,170.075) 16.935,169.475 ; TP1.1@16.66,169.85 ccw(c18.17,169.935) 17.296,168.7 ; TP1.1@16.66,169.85 ccw(c18.17,169.935) 17.296,168.7 ; TP1.1@16.66,169.85 ccw(c18.17,169.935) 17.296,168.7 ; TP1.1@16.66,169.656 ccw(c18.526,169.567) 17.592,167.95 ; TP1.1@16.66,169.656 ccw(c18.526,169.567) 17.592,167.95 ; TP1.1@16.66,169.656 ccw(c18.526,169.567) 17.592,167.95 ; TP1.1@16.662,169.691 ccw(c18.383,169.64) 17.471,168.18 ; TP1.1@16.662,169.691 ccw(c18.383,169.64) 17.471,168.18 ; TP1.1@16.662,169.691 ccw(c18.383,169.64) 17.471,168.18 ; TP1.1@16.663,169.751 ccw(c18.254,169.756) 17.37,168.433 ; TP1.1@16.663,169.751 ccw(c18.254,169.756) 17.37,168.433 ; TP1.1@16.663,169.751 ccw(c18.254,169.756) 17.37,168.433 ; 40.163,169.295 cw(c40.655,169.295) v1@40.307,169.643 ; 40.163,169.295 cw(c40.655,169.295) v1@40.307,169.643 ; 40.163,169.295 cw(c40.655,169.295) v1@40.307,169.643
BATCSP: C5.2 C8.2 C17.1 L1.1 R3.2 U3.14 | length 58.5
  Top Layer w0.254: v1(18.22,172.39) 18.222,172.392 R3.2@18.222,173.492 ; v1@40.765,169.32 ccw(c40.82,169.579) 41.039,169.432 ; v1@40.78,169.316 ccw(c40.876,169.596) 41.006,169.33 ; v1@40.924,169.291 cw(c41.429,168.711) C17.1@41.481,169.478 ; 41.007,169.331 ccw(c41.139,169.063) v1@40.856,169.16 ; 41.04,169.392 ccw(c40.679,169.806) C17.1@41.228,169.769 ; U3.14@41.82,172.4 41.82,170.02 C17.1@41.55,169.75 41.29,169.75 v1(40.74,169.2) ; R3.2@18.029,173.299 cw(c17.563,172.833) 18.222,172.833 ; R3.2@18.029,173.299 cw(c17.563,172.833) 18.222,172.833 ; R3.2@18.029,173.299 cw(c17.563,172.833) 18.222,172.833 ; v1@18.133,172.477 ccw(c17.919,172.691) 18.222,172.691 ; v1@18.133,172.477 ccw(c17.919,172.691) 18.222,172.691 ; v1@18.133,172.477 ccw(c17.919,172.691) 18.222,172.691 ; 18.222,172.683 ccw(c18.513,172.683) v1@18.307,172.477 ; 18.222,172.683 ccw(c18.513,172.683) v1@18.307,172.477 ; 18.222,172.683 ccw(c18.513,172.683) v1@18.307,172.477 ; 18.222,172.833 cw(c18.881,172.833) R3.2@18.415,173.299 ; 18.222,172.833 cw(c18.881,172.833) R3.2@18.415,173.299 ; 18.222,172.833 cw(c18.881,172.833) R3.2@18.415,173.299 ; v1(40.74,169.2) cw(c41.416,168.524) C17.1@41.481,169.478 ; v1(40.74,169.2) cw(c41.416,168.524) C17.1@41.481,169.478 ; v1(40.74,169.2) cw(c41.416,168.524) C17.1@41.481,169.478 ; v1@40.74,169.323 ccw(c40.74,169.62) 40.95,169.41 ; v1@40.74,169.323 ccw(c40.74,169.62) 40.95,169.41 ; v1@40.74,169.323 ccw(c40.74,169.62) 40.95,169.41 ; v1@40.772,169.319 ccw(c40.849,169.606) 40.997,169.348 ; v1@40.772,169.319 ccw(c40.849,169.606) 40.997,169.348 ; v1@40.772,169.319 ccw(c40.849,169.606) 40.997,169.348 ; v1@40.772,169.319 ccw(c40.849,169.606) 40.997,169.348 ; v1@40.772,169.319 ccw(c40.849,169.606) 40.997,169.348 ; v1@40.772,169.319 ccw(c40.849,169.606) 40.997,169.348 ; v1@40.856,169.16 cw(c41.366,168.985) C17.1@41.129,169.469 ; v1@40.856,169.16 cw(c41.366,168.985) C17.1@41.129,169.469 ; v1@40.856,169.16 cw(c41.366,168.985) C17.1@41.129,169.469 ; v1@40.856,169.16 cw(c41.366,168.985) C17.1@41.129,169.469 ; v1@40.859,169.168 cw(c41.146,169.091) 40.997,169.348 ; v1@40.859,169.168 cw(c41.146,169.091) 40.997,169.348 ; v1@40.859,169.168 cw(c41.146,169.091) 40.997,169.348 ; v1@40.859,169.168 cw(c41.146,169.091) 40.997,169.348 ; v1@40.859,169.168 cw(c41.146,169.091) 40.997,169.348 ; v1@40.859,169.168 cw(c41.146,169.091) 40.997,169.348 ; v1@40.863,169.2 cw(c41.16,169.2) 40.95,169.41 ; v1@40.863,169.2 cw(c41.16,169.2) 40.95,169.41 ; v1@40.863,169.2 cw(c41.16,169.2) 40.95,169.41 ; v1@40.923,169.369 ccw(c40.761,170.198) C17.1@41.484,169.76 ; v1@40.923,169.369 ccw(c40.761,170.198) C17.1@41.484,169.76 ; v1@40.923,169.369 ccw(c40.761,170.198) C17.1@41.484,169.76 ; C17.1@41.407,169.943 ccw(c40.41,170.94) 41.82,170.94 ; C17.1@41.407,169.943 ccw(c40.41,170.94) 41.82,170.94 ; C17.1@41.407,169.943 ccw(c40.41,170.94) 41.82,170.94 ; C17.1@41.587,169.763 ccw(c41.023,170.327) 41.82,170.327 ; C17.1@41.587,169.763 ccw(c41.023,170.327) 41.82,170.327 ; C17.1@41.587,169.763 ccw(c41.023,170.327) 41.82,170.327 ; 41.542,170.178 ccw(c41.827,170.013) 41.612,169.764 cw(c41.827,170.013) 41.542,170.178 ; 41.696,170.443 ccw(c42.031,170.25) 41.778,169.957 cw(c42.031,170.25) 41.696,170.443
  power w0.254: v1(18.22,172.39) 18.356,172.254 19.836,172.254 20.454,171.636 20.454,168.973 20.74,168.687 40.227,168.687 v1(40.74,169.2) ; v1@18.307,172.477 ccw(c18.845,173.015) 18.845,172.254 ; v1@18.307,172.477 ccw(c18.845,173.015) 18.845,172.254 ; v1@18.307,172.477 ccw(c18.845,173.015) 18.845,172.254 ; 40.53,168.99 cw(c40.74,168.78) v1@40.74,169.077 ; 40.53,168.99 ccw(c40.32,169.2) v1@40.617,169.2 ; 40.53,168.99 ccw(c40.32,169.2) v1@40.617,169.2 ; 40.53,168.99 cw(c40.74,168.78) v1@40.74,169.077 ; 40.53,168.99 ccw(c40.32,169.2) v1@40.617,169.2 ; 40.53,168.99 cw(c40.74,168.78) v1@40.74,169.077 ; v1@18.296,172.293 cw(c18.458,172.087) 18.589,172.314 ccw(c18.458,172.087) v1@18.296,172.293
BSET/HLED: R5.2 R6.2 U3.17 | length 60.9
  Top Layer w0.2: R5.2@44.64,169.78 45.44,168.98 46.674,168.98 47.074,168.58 47.074,167.966 v1(47.09,167.95) ; v1(62.75,172.27) 62.75,170.66 63.255,170.155 67.284,170.155 R6.2@68.106,169.333 ; R5.2@44.724,169.733 cw(c44.528,169.158) 45.115,169.315 ; R5.2@44.724,169.733 cw(c44.528,169.158) 45.115,169.315 ; R5.2@44.724,169.733 cw(c44.528,169.158) 45.115,169.315 ; R5.2@44.74,169.53 cw(c44.74,169.168) 44.996,169.424 ; R5.2@44.74,169.53 cw(c44.74,169.168) 44.996,169.424 ; R5.2@44.74,169.53 cw(c44.74,169.168) 44.996,169.424 ; R5.2@44.99,169.78 ccw(c45.835,169.78) 45.237,169.183 ; R5.2@44.99,169.78 ccw(c45.835,169.78) 45.237,169.183 ; R5.2@44.99,169.78 ccw(c45.835,169.78) 45.237,169.183 ; v1@46.984,168.056 ccw(c46.766,168.274) 47.074,168.274 ; v1@46.984,168.056 ccw(c46.766,168.274) 47.074,168.274 ; v1@46.984,168.056 ccw(c46.766,168.274) 47.074,168.274 ; 47.074,168.35 ccw(c47.49,168.35) v1@47.196,168.056 ; 47.074,168.35 ccw(c47.49,168.35) v1@47.196,168.056 ; 47.074,168.35 ccw(c47.49,168.35) v1@47.196,168.056 ; v1@62.644,172.164 cw(c62.388,171.908) 62.75,171.908 ; v1@62.644,172.164 cw(c62.388,171.908) 62.75,171.908 ; v1@62.644,172.164 cw(c62.388,171.908) 62.75,171.908 ; 62.75,171.908 cw(c63.112,171.908) v1@62.856,172.164 ; 62.75,171.908 cw(c63.112,171.908) v1@62.856,172.164 ; 62.75,171.908 cw(c63.112,171.908) v1@62.856,172.164 ; 67.509,169.93 ccw(c68.106,170.527) R6.2@68.106,169.683 ; 67.509,169.93 ccw(c68.106,170.527) R6.2@68.106,169.683 ; 67.509,169.93 ccw(c68.106,170.527) R6.2@68.106,169.683 ; 67.75,169.689 cw(c67.494,169.433) R6.2@67.856,169.433 ; 67.75,169.689 cw(c67.494,169.433) R6.2@67.856,169.433 ; 67.75,169.689 cw(c67.494,169.433) R6.2@67.856,169.433 ; 67.641,169.807 cw(c67.484,169.221) 68.059,169.416 ccw(c67.484,169.221) 67.641,169.807
  Top Layer w0.254: U3.17@43.32,172.4 43.32,171.1 R5.2@44.64,169.78 ; 44.089,170.331 cw(c43.537,169.78) R5.2@44.317,169.78 ; 44.089,170.331 cw(c43.537,169.78) R5.2@44.317,169.78 ; 44.089,170.331 cw(c43.537,169.78) R5.2@44.317,169.78 ; R5.2@44.241,170.063 ccw(c44.683,170.182) R5.2@44.53,169.751 ; R5.2@44.241,170.063 ccw(c44.683,170.182) R5.2@44.53,169.751 ; R5.2@44.241,170.063 ccw(c44.683,170.182) R5.2@44.53,169.751 ; R5.2@44.33,170.09 ccw(c44.54,170.3) R5.2@44.54,170.003 ; R5.2@44.33,170.09 ccw(c44.54,170.3) R5.2@44.54,170.003 ; R5.2@44.33,170.09 ccw(c44.54,170.3) R5.2@44.54,170.003
  Signal w0.2: v1(47.09,167.95) 47.09,168.028 47.962,168.9 53.102,168.9 53.38,168.9 v1(53.96,168.32) ; v1@53.81,168.32 ccw(c53.448,168.32) 53.704,168.576 ccw(c53.96,168.832) v1@53.96,168.47 ; v1@47.24,167.95 cw(c47.79,167.95) 47.401,168.339 ; v1@47.24,167.95 cw(c47.79,167.95) 47.401,168.339 ; v1@47.24,167.95 cw(c47.79,167.95) 47.401,168.339
  power w0.2: v1(53.96,168.32) 53.96,172.524 54.346,172.91 62.11,172.91 v1(62.75,172.27) ; v1@53.854,168.426 ccw(c53.598,168.682) 53.96,168.682 ; v1@53.854,168.426 ccw(c53.598,168.682) 53.96,168.682 ; v1@53.854,168.426 ccw(c53.598,168.682) 53.96,168.682 ; 53.96,168.682 ccw(c54.322,168.682) v1@54.066,168.426 ; 53.96,168.682 ccw(c54.322,168.682) v1@54.066,168.426 ; 53.96,168.682 ccw(c54.322,168.682) v1@54.066,168.426 ; 62.494,172.526 cw(c62.238,172.27) v1@62.6,172.27 ; 62.494,172.526 ccw(c62.75,172.782) v1@62.75,172.42 ; 62.494,172.526 cw(c62.248,172.274) v1@62.6,172.271 ; 62.494,172.526 ccw(c62.746,172.772) v1@62.749,172.42 ; 62.494,172.526 ccw(c62.75,172.782) v1@62.75,172.42 ; 62.494,172.526 cw(c62.238,172.27) v1@62.6,172.27 ; 62.494,172.526 ccw(c62.746,172.772) v1@62.749,172.42 ; 62.494,172.526 ccw(c62.75,172.782) v1@62.75,172.42 ; 62.494,172.526 cw(c62.238,172.27) v1@62.6,172.27 ; 62.494,172.526 ccw(c62.746,172.772) v1@62.749,172.42 ; 62.494,172.526 cw(c62.248,172.274) v1@62.6,172.271 ; 62.494,172.526 ccw(c62.75,172.782) v1@62.75,172.42 ; 62.494,172.526 cw(c62.238,172.27) v1@62.6,172.27 ; 62.494,172.526 cw(c62.248,172.274) v1@62.6,172.271 ; 62.494,172.526 ccw(c62.75,172.782) v1@62.75,172.42 ; 62.494,172.526 cw(c62.238,172.27) v1@62.6,172.27 ; 62.501,172.519 ccw(c62.744,172.768) v1@62.748,172.42 ; 62.501,172.519 cw(c62.252,172.276) v1@62.6,172.272 ; 62.501,172.519 cw(c62.252,172.276) v1@62.6,172.272 ; 62.501,172.519 cw(c62.252,172.276) v1@62.6,172.272 ; 62.501,172.519 ccw(c62.744,172.768) v1@62.748,172.42 ; 62.501,172.519 ccw(c62.744,172.768) v1@62.748,172.42
BST: C9.1 U3.7 | length 6.4
  Top Layer w0.254: C9.1@36.623,173.811 37.512,174.7 U3.7@39.52,174.7 ; C9.1@36.673,174.084 ccw(c36.673,174.622) 37.053,174.242 ; C9.1@36.673,174.084 ccw(c36.673,174.622) 37.053,174.242 ; C9.1@36.673,174.084 ccw(c36.673,174.622) 37.053,174.242 ; C9.1@36.946,173.811 cw(c37.725,173.811) 37.174,174.362 ; C9.1@36.946,173.811 cw(c37.725,173.811) 37.174,174.362 ; C9.1@36.946,173.811 cw(c37.725,173.811) 37.174,174.362
CC1: C3.1 R9.1 U3.34 | length 53.4
  Top Layer w0.2: U3.34@43.32,178.5 43.32,179.86 v1(43.41,179.95) ; v1@61.233,189.36 v1(61.309,189.436) ; 43.32,179.371 cw(c43.989,179.371) v1@43.516,179.844 ; 43.32,179.371 cw(c43.989,179.371) v1@43.516,179.844 ; 43.32,179.371 cw(c43.989,179.371) v1@43.516,179.844 ; v1@43.332,179.822 cw(c43.253,179.692) 43.385,179.616 ; v1@43.332,179.822 cw(c43.253,179.692) 43.385,179.616 ; v1@43.332,179.822 cw(c43.253,179.692) 43.385,179.616
  power w0.2: v1(43.41,179.95) 43.302,179.95 43.26,179.992 43.26,180.178 42.228,181.21 40.751,181.21 39.961,180.42 35.945,180.42 35.64,180.725 35.64,184.635 37.78,186.775 38.357,186.775 40.498,188.916 54.806,188.916 55.326,189.436 57.903,189.436 58.733,188.606 60.402,188.606 v1@61.233,189.436 ; 60.922,189.126 cw(c61.309,188.739) v1@61.309,189.286 ; v1(61.309,189.436) v1@61.386,189.513 ; 43.099,180.339 cw(c42.71,179.95) 43.26,179.95 ccw(c42.71,179.95) 43.099,180.339
  Bottom Layer w0.2: C3.1@61.102,189.675 cw(c61.065,189.556) v1@61.19,189.556 ; C3.1@61.24,190.062 ccw(c61.24,190.704) 61.694,190.25 ; C3.1@61.24,190.262 ccw(c61.24,191.387) 62.036,190.592 ; C3.1@61.278,189.675 ccw(c61.315,189.556) v1@61.19,189.556 ; v1(61.309,189.436) v1@61.19,189.556 ; C3.1@61.342,189.697 cw(c61.297,189.564) 61.437,189.564 cw(c61.577,189.564) C3.1@61.532,189.697 ; v1@61.397,189.558 cw(c61.688,189.962) C3.1@61.19,189.962 ; C3.1@61.437,189.981 cw(c60.914,189.981) 61.221,189.558 C3.1@61.19,189.589 ; C3.1@61.54,189.962 cw(c61.864,189.962) C3.1@61.635,190.191 ; 62.237,190.793 ccw(c61.639,191.39) R9.1@62.484,191.39 ; 62.478,191.034 cw(c62.734,190.778) R9.1@62.734,191.14 ; R9.1@62.834,191.39 61.406,189.962 C3.1@61.19,189.962 ; v1@61.19,189.556 C3.1@61.19,189.589 ; C3.1@61.19,189.589 C3.1@61.19,189.962
CC1-1: J2.A5 R9.2 | length 7.1
  Top Layer w0.2: J2.A5@61.233,187.071 61.233,188.612 v1(61.352,188.731) ; 61.233,188.081 cw(c62.002,188.081) v1@61.458,188.625
  Bottom Layer w0.2: v1@61.352,188.681 ccw(c61.352,189.34) 61.818,188.874 ; v1(61.352,188.731) 61.675,188.731 ; v1@61.352,188.881 ccw(c61.352,190.023) 62.159,189.215 ; v1@61.467,188.634 cw(c61.675,188.458) 61.675,188.731 ; v1@61.467,188.828 ccw(c61.675,189.004) 61.675,188.731 ; 62.237,189.293 ccw(c61.639,189.89) R9.2@62.484,189.89 ; 62.478,189.534 cw(c62.734,189.278) R9.2@62.734,189.64 ; R9.2@62.834,189.89 61.675,188.731
CC2: C2.1 R10.1 U3.35 | length 51.8
  Top Layer w0.2: v1(42.71,179.95) 42.696,179.936 42.82,179.811 U3.35@42.82,178.5 ; v1@42.604,179.844 cw(c42.082,179.322) 42.82,179.322 ; v1@42.604,179.844 cw(c42.082,179.322) 42.82,179.322 ; v1@42.604,179.844 cw(c42.082,179.322) 42.82,179.322 ; 42.753,179.586 cw(c42.918,179.681) v1@42.802,179.831 ; 42.753,179.586 cw(c42.918,179.681) v1@42.802,179.831 ; 42.753,179.586 cw(c42.918,179.681) v1@42.802,179.831
  power w0.2: v1(42.71,179.95) 42.71,180.028 41.928,180.81 40.917,180.81 40.127,180.02 35.779,180.02 35.24,180.559 35.24,184.801 37.614,187.175 38.191,187.175 40.506,189.49 54.814,189.49 55.161,189.836 58.28,189.836 v1(58.833,189.284) ; v1@58.683,189.284 ccw(c58.321,189.284) 58.577,189.54 ccw(c58.833,189.796) v1@58.833,189.434 ; 42.399,180.339 cw(c42.01,179.95) 42.56,179.95 ccw(c42.01,179.95) 42.399,180.339
  Bottom Layer w0.2: R10.1@57.144,191.338 57.194,191.338 C2.1@58.561,189.971 ; R10.1@57.244,191.088 cw(c57.244,190.605) 57.586,190.946 ; R10.1@57.494,191.338 ccw(c58.218,191.338) 57.706,190.826 ; 58.091,190.441 cw(c57.493,189.844) C2.1@58.338,189.844 ; 58.211,190.321 ccw(c58.638,190.748) C2.1@58.638,190.144 ; C2.1@58.498,189.971 ccw(c58.498,190.412) C2.1@58.81,190.1 ; C2.1@58.543,189.794 cw(c58.893,189.537) C2.1@58.893,189.971 ; C2.1@58.543,190.148 ccw(c58.893,190.405) C2.1@58.893,189.971 ; C2.1@58.594,189.559 cw(c58.55,189.429) v1@58.688,189.429 ; C2.1@58.609,189.971 cw(c58.609,189.687) C2.1@58.81,189.888 ; C2.1@58.783,189.559 ccw(c58.826,189.429) v1@58.688,189.429 ; v1(58.833,189.284) v1@58.688,189.429 ; v1@58.918,189.408 cw(c59.218,189.844) C2.1@58.688,189.844 ; C2.1@58.561,189.971 C2.1@58.688,189.844 ; C2.1@58.561,189.971 C2.1@58.893,189.971 ; v1@58.688,189.429 C2.1@58.688,189.844 ; C2.1@58.688,189.844 58.916,189.994 C2.1@58.893,189.971
CC2-1: J2.B5 R10.2 | length 5.3
  Top Layer w0.2: v1@57.887,188.52 cw(c57.887,188.158) 58.143,188.414 cw(c58.399,188.67) v1@58.037,188.67 ; v1(57.887,188.67) 58.233,188.324 J2.B5@58.233,187.071
  Bottom Layer w0.2: R10.2@57.144,189.838 57.887,189.095 v1(57.887,188.67) ; R10.2@57.244,189.588 cw(c57.244,189.226) 57.5,189.482 ; R10.2@57.494,189.838 ccw(c58.339,189.838) 57.741,189.241 ; v1@57.781,188.776 ccw(c57.525,189.032) 57.887,189.032 ccw(c58.249,189.032) v1@57.993,188.776